# Altium PCB PCB_oshpark.PcbDoc
Units mil, origin at the board's own origin, x right, y up, seen from the top; angles counter-clockwise.
Board outline 1432.79 x 1377.95 mil, 2 copper layers (Top Layer, Bottom Layer), stack 62.8 mil thick; 28 components, 36 nets, 108 pads, 27 vias.
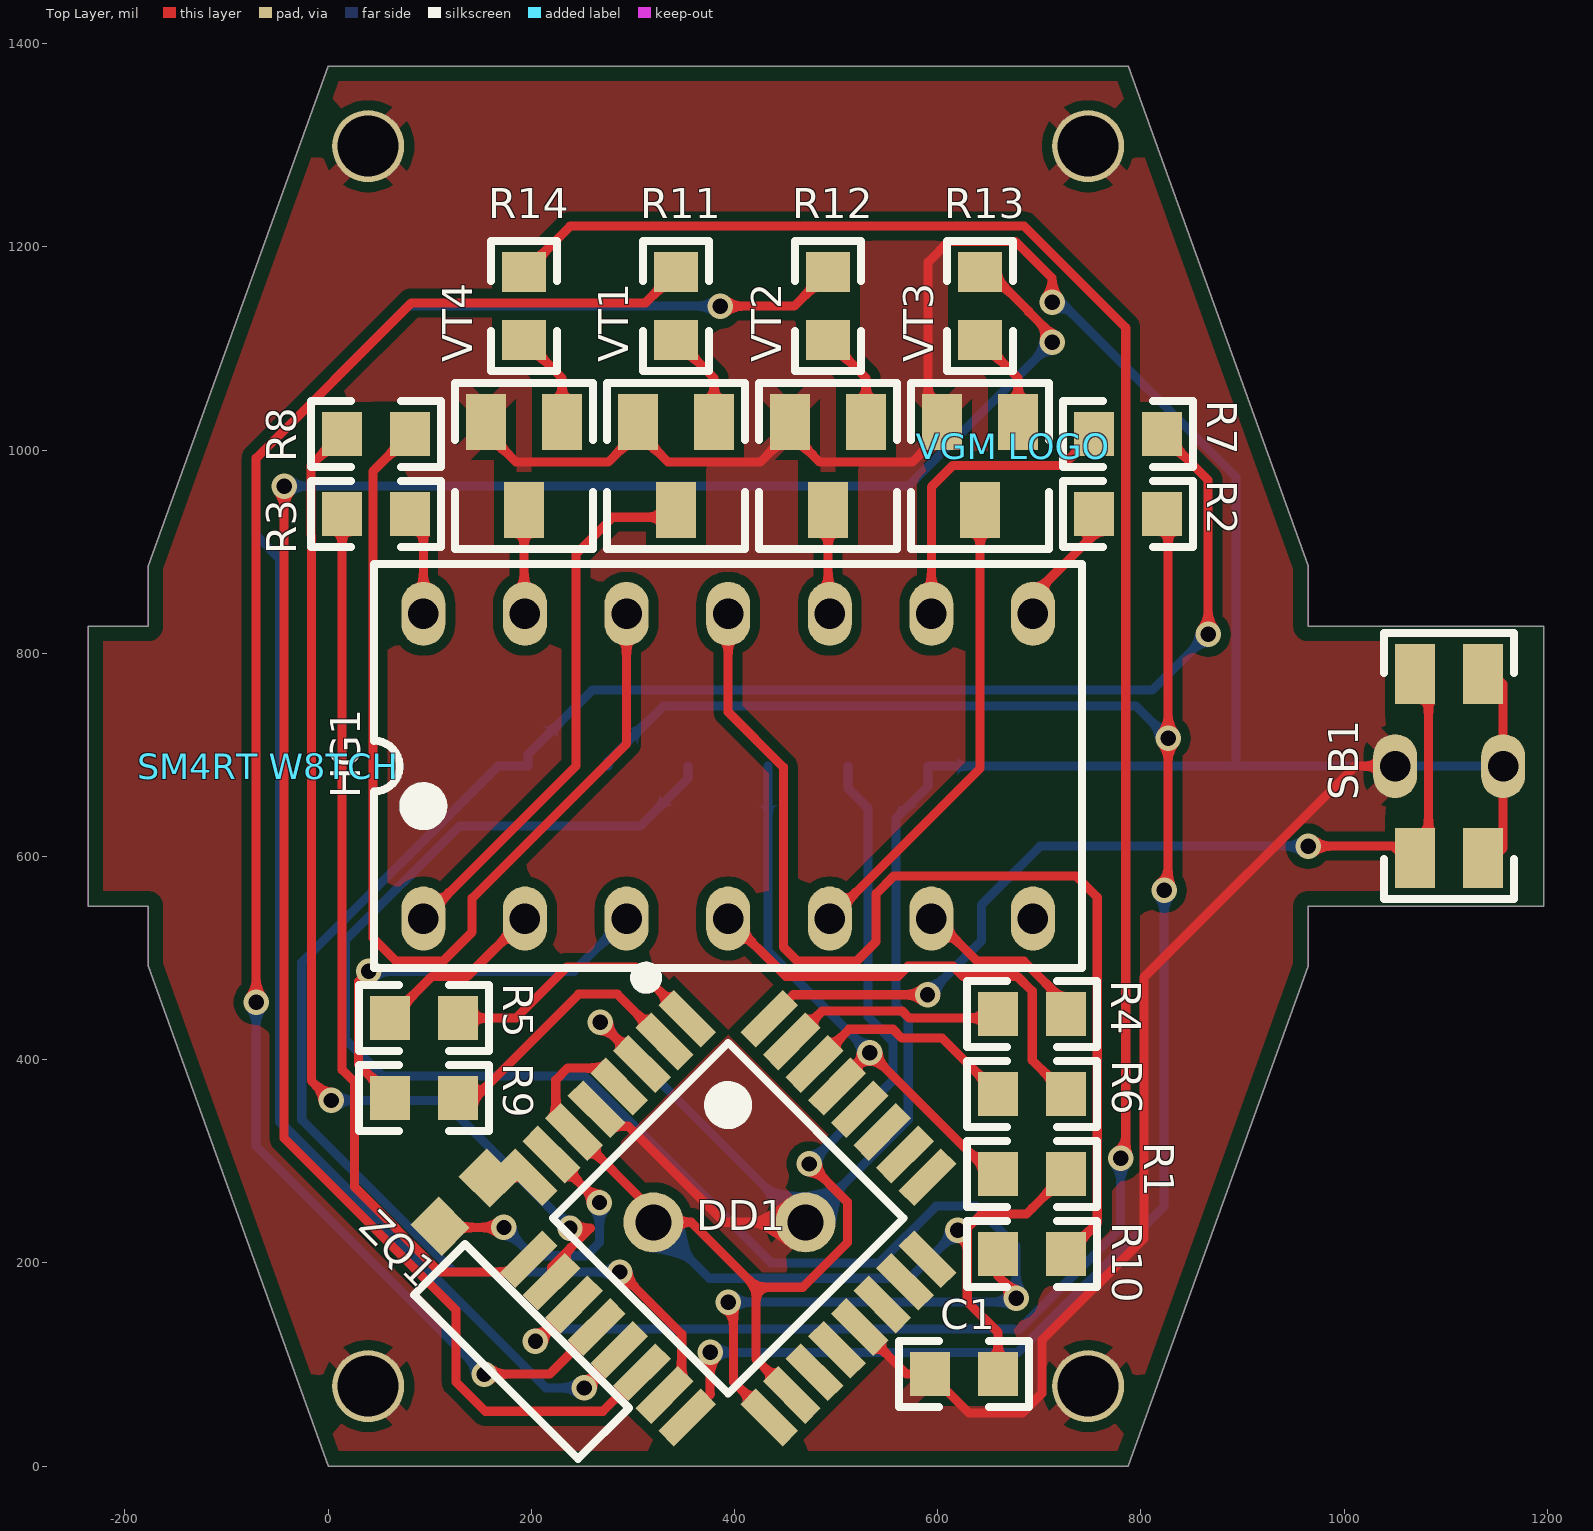
[diagram p0: Top Layer view]
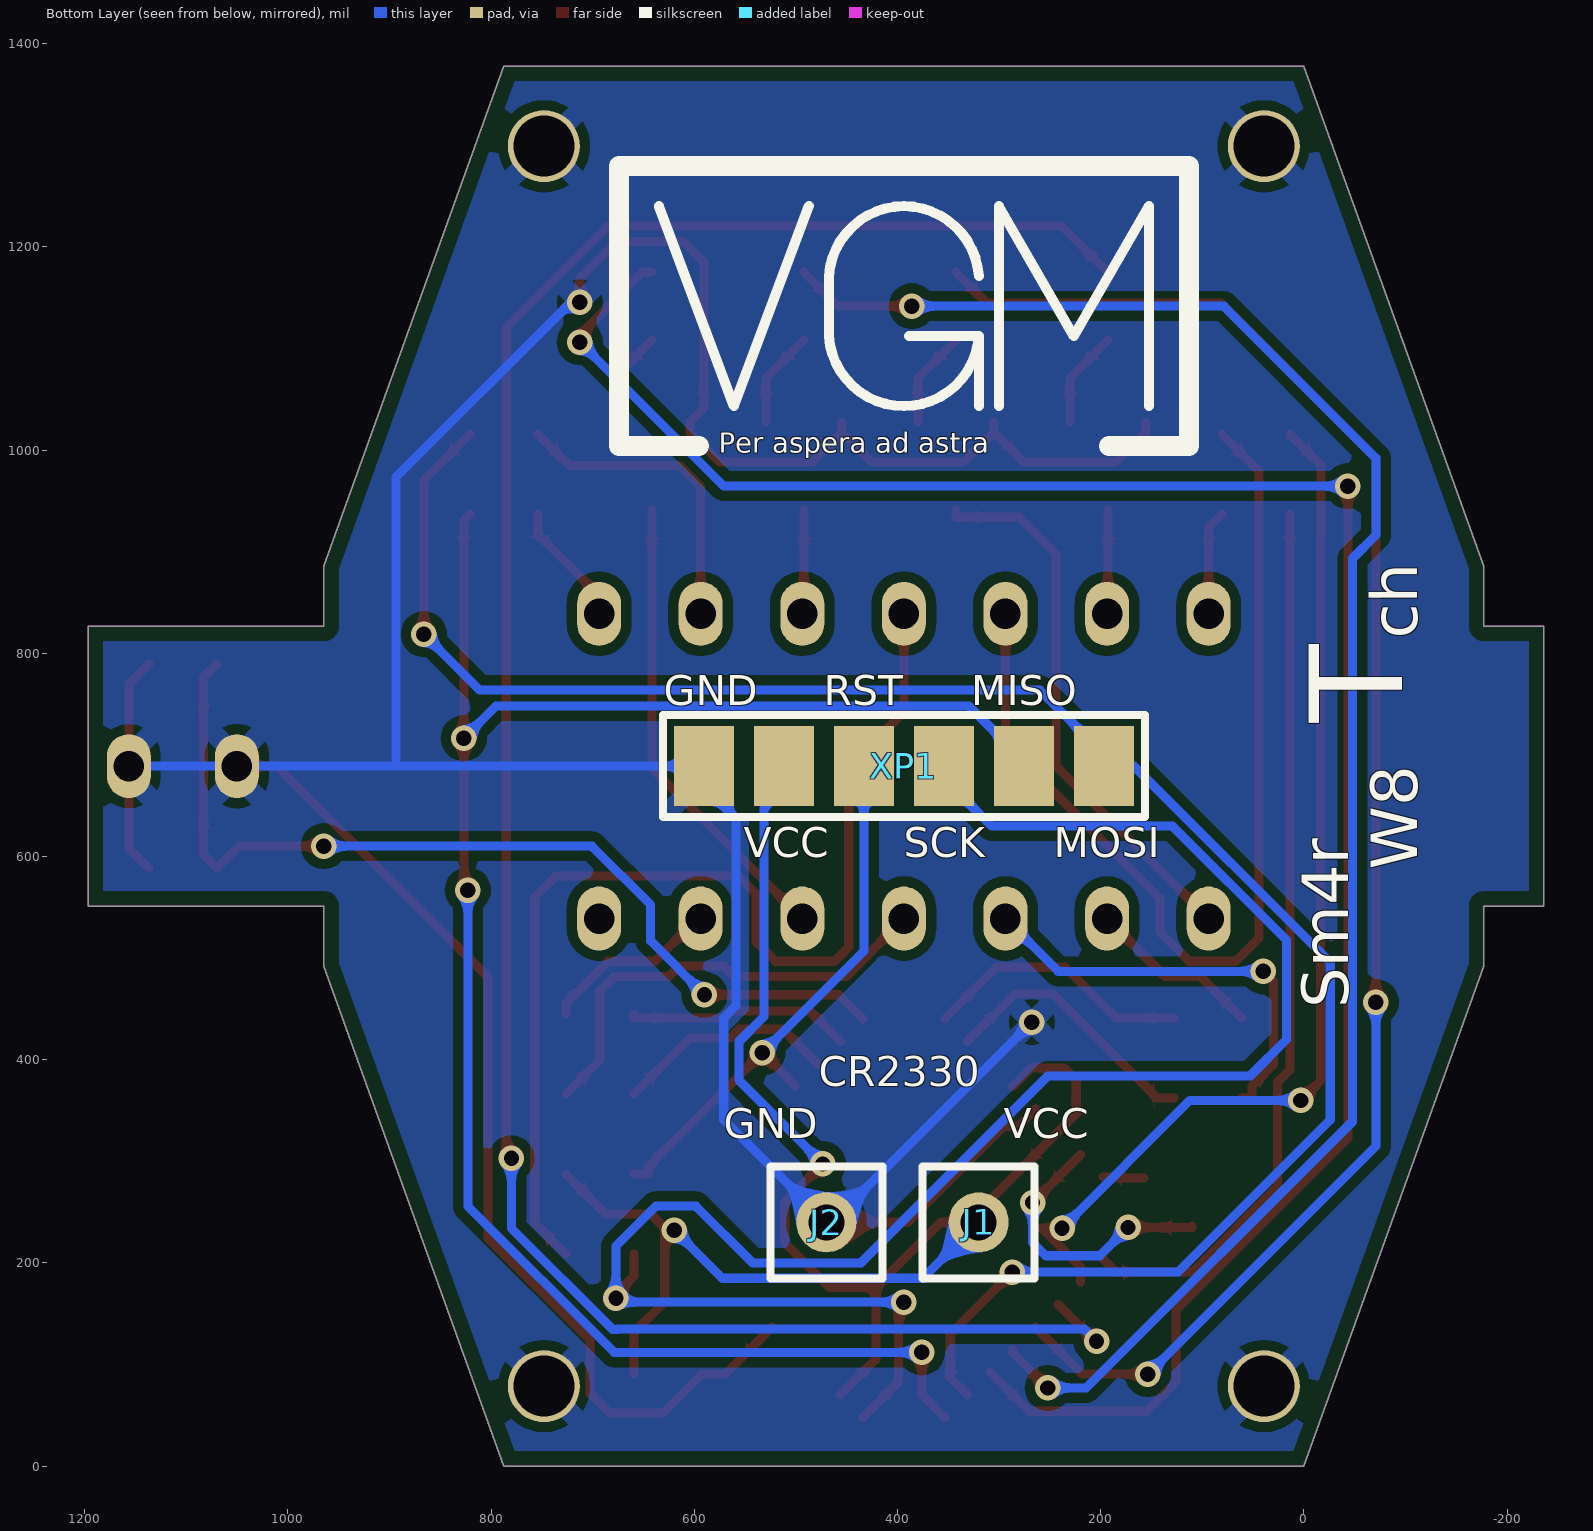
[diagram p1: Bottom Layer view, seen from below]

## Layer stack, top to bottom
Top Solder: solder mask 1, Solder Resist, Dk 3.5
Top Layer: signal copper 1.4
Dielectric 1: dielectric 60, FR-4, Dk 4.6
Bottom Layer: signal copper 1.4
Bottom Solder: solder mask 1, Solder Resist, Dk 3.5

## Board outline
-177.17,492.13 -177.17,551.18 -236.22,551.18 -236.22,826.77 -177.17,826.77 -177.17,885.83 0,1377.95 787.4,1377.95 964.57,885.83 964.57,826.77 1196.57,826.77 1196.57,551.18 964.57,551.18 964.57,492.13 787.4,0 0,0

## Design rules (kind name [scope] priority, off if disabled: settings)
Clearance Clearance_KeepOut [OnLayer('Keep-Out Layer') vs InNetClass('All Nets')] p1: gap=15
Clearance [All] p2: gap=6 except(10: Arc-Poly Track-Poly SMDPad-Poly THPad-Poly Via-Poly Fill-Poly Poly-Poly)
ComponentClearance [All] p1: gap=1 collisioncheckmode=3 verticalgap=10 showdistances=FALSE
PolygonConnect [All] p1: connectstyle=Relief reliefconductorwidth=19.68 reliefentries=4 polygonreliefangle="45 Angle" airgapwidth=9.84
RoutingVias [All] p1: holewidth=15 width=25 viastyle="Through Hole" minholewidth=15 minwidth=25 maxholewidth=30 maxwidth=40
SMDNeckDown [All] p1: percent=50.000
SilkToSilkClearance [All] p1: silktosilkclearance=1
SolderMaskExpansion [All] p1: expansion=4
Width [All] p1: maxlimit=40 minlimit=9 preferedwidth=9 minimp=50.000000 maximp=50.000000 favimp=50.000000
28 further rules are at their usual default settings.

## Classes and differential pairs
pad class "Through hole": Free- HG1-1 HG1-2 HG1-3 HG1-4 HG1-5 HG1-6 HG1-7 HG1-8 HG1-9 HG1-10 HG1-11 HG1-12 HG1-13 HG1-14 J1-1 J2-1 SB1-GND
pad class SMT: C1-1 C1-2 DD1-1 DD1-2 DD1-3 DD1-4 DD1-5 DD1-6 DD1-7 DD1-8 DD1-9 DD1-10 DD1-11 DD1-12 DD1-13 DD1-14 DD1-15 DD1-16 DD1-17 DD1-18 DD1-19 DD1-20 DD1-21 DD1-22 DD1-23 DD1-24 DD1-25 DD1-26 DD1-27 DD1-28 DD1-29 DD1-30 DD1-31 DD1-32 R1-1 R1-2 R2-1 R2-2 R3-1 R3-2 R4-1 R4-2 R5-1 R5-2 R6-1 R6-2 R7-1 R7-2 R8-1 R8-2 R9-1 R9-2 R10-1 R10-2 R11-1 R11-2 R12-1 R12-2 R13-1 R13-2 R14-1 R14-2 SB1-1 SB1-2 SB1-3 SB1-4 VT1-1 VT1-2 VT1-3 VT2-1 VT2-2 VT2-3 VT3-1 VT3-2 VT3-3 VT4-1 VT4-2 VT4-3 XP1-1 XP1-2 XP1-3 XP1-4 XP1-5 XP1-6 Y1-1 Y1-2

## Components (designator, comment, footprint, x,y, rotation, side; value= is the part's Value field where it differs from the comment)
C1 "Ceramic Cap" "MLCC 0603 (1608)" 625.98,90.55 r0 top
DD1 "ATmega48" TQFP-32 393.7,244.1 r315 top locked
HG1 "GNQ-2841Cx/Dx" GNQ-2841CX/DX 393.7,688.98 r0 top locked
J1 "Vcc" PIN1 320,240 r0 bottom locked
J2 "GND" PIN1 470,240 r0 bottom locked
R1 "Resistor" "RESISTOR 0603 (1208)" 692.91,287.4 r0 top
R2 "Resistor" "RESISTOR 0603 (1208)" 787.4,937.01 r180 top
R3 "Resistor" "RESISTOR 0603 (1208)" 47.24,937.01 r0 top
R4 "Resistor" "RESISTOR 0603 (1208)" 692.91,444.88 r0 top
R5 "Resistor" "RESISTOR 0603 (1208)" 94.49,440.95 r180 top
R6 "Resistor" "RESISTOR 0603 (1208)" 692.91,366.14 r0 top
R7 "Resistor" "RESISTOR 0603 (1208)" 787.4,1015.75 r180 top
R8 "Resistor" "RESISTOR 0603 (1208)" 47.24,1015.75 r0 top
R9 "Resistor" "RESISTOR 0603 (1208)" 94.49,362.21 r180 top
R10 "Resistor" "RESISTOR 0603 (1208)" 692.91,208.66 r0 top
R11 "Resistor" "RESISTOR 0603 (1208)" 342.52,1141.73 r270 top
R12 "Resistor" "RESISTOR 0603 (1208)" 492.13,1141.73 r270 top
R13 "Resistor" "RESISTOR 0603 (1208)" 641.73,1141.73 r270 top
R14 "Resistor" "RESISTOR 0603 (1208)" 192.91,1141.73 r270 top
SB1 "IT-1189UE" IT-1189UE 1103.35,688.98 r90 top
"SM4RT W8TCH" "" "Sm4rt W8tch" -59.06,688.92 r90 top
"VGM LOGO" "" "LOGO medium" 674.21,1003.94 r180 top
VT1 "BC817-40" SOT-23 342.52,984.25 r180 top
VT2 "BC817-40" SOT-23 492.13,984.25 r180 top
VT3 "BC817-40" SOT-23 641.73,984.25 r180 top
VT4 "BC817-40" SOT-23 192.91,984.25 r180 top
XP1 "AVR Programming Connector" "AVR PROGRAMMING SMD PAD" 393.7,688.98 r180 bottom locked
ZQ1 "XTAL" "XTAL 32.768 KHZ 0603" 133.86,259.84 r225 top

## Footprints (in the part's own frame and the unit in brackets; to place one, negate y for a bottom-side part, rotate by r counter-clockwise, add the part's x,y. Pads: shape width x height; smd on the part's side, far side on the other; paste and mask are expansions set on the pad)
"AVR PROGRAMMING SMD PAD" [mm] "Group of pads for programming AVR MCU"
  rect 1.5x2 smd mask+0.1: 1(-5,0) 2(-3,0) 3(-1,0) 4(1,0) 5(3,0) 6(5,0)
  silkscreen extent -6.02,-1.28 6.02,1.28
GNQ-2841CX/DX [mm] "7 Segment Display x4"
  oval 1.1x1.6 hole 0.762 unplated mask+0.075: 1(-7.62,-3.81) 2(-5.08,-3.81) 3(-2.54,-3.81) 4(0,-3.81) 5(2.54,-3.81) 6(5.08,-3.81) 7(7.62,-3.81) 8(7.62,3.81) 9(5.08,3.81) 10(2.54,3.81) 11(0,3.81) 12(-2.54,3.81) 13(-5.08,3.81) 14(-7.62,3.81)
  silkscreen extent -8.85,-5.05 8.85,5.05, body extent -16.1,-5.05 16.1,5.05, height 4.7
IT-1189UE [mm] "SMD Tact Switch"
  rect 1.5x1 smd mask+0.1: 1(-2.3,0.85) 2(2.3,0.85) 3(-2.3,-0.85) 4(2.3,-0.85)
  oval 1.6x1.1 hole 0.762 unplated mask+0.075: GND(0,1.35) GND(0,-1.35)
  silkscreen extent -3.32,-1.63 3.32,1.63, body extent -2.75,-2.8 2.75,1.8, height 1.6
"LOGO medium" [mil] "My logo (14.25x7)"
"MLCC 0603 (1608)" [mm] "Ceramic Cap"
  rect 1x1.1 smd mask+0.1: 1(-0.85,0) 2(0.85,0)
  silkscreen extent -1.63,-0.82 1.63,0.82, body extent -0.8,-0.4 0.8,0.4, height 0.81
PIN1 [mm] "Connector; Plug"
  round 1.5 hole 0.9 unplated mask+0.075: 1(0,0)
  silkscreen extent -1.4,-1.4 1.4,1.4
"RESISTOR 0603 (1208)" [mm] "SMD Chip Resistor"
  rect 1x1.1 smd mask+0.1: 1(-0.85,0) 2(0.85,0)
  silkscreen extent -1.63,-0.82 1.63,0.82, body extent -0.8,-0.42 0.8,0.43, height 0.46
"Sm4rt W8tch" [mil] "Sm4rt W8tch official logo"
SOT-23 [mm]
  rect 1x1.4 smd mask+0.1: 1(-0.95,-1.1) 2(0.95,-1.1) 3(0,1.1)
  silkscreen extent -1.73,-2.07 1.73,2.07, body extent -1.45,-1.2 1.45,1.2, height 1
TQFP-32 [mm] "TQFP, 32-Leads"
  rect 1.5x0.55 smd mask+0.1: 1(-4.25,2.8) 2(-4.25,2) 3(-4.25,1.2) 4(-4.25,0.4) 5(-4.25,-0.4) 6(-4.25,-1.2) 7(-4.25,-2) 8(-4.25,-2.8) 17(4.25,-2.8) 18(4.25,-2) 19(4.25,-1.2) 20(4.25,-0.4) 21(4.25,0.4) 22(4.25,1.2) 23(4.25,2) 24(4.25,2.8)
  rect 0.55x1.5 smd mask+0.1: 9(-2.8,-4.25) 10(-2,-4.25) 11(-1.2,-4.25) 12(-0.4,-4.25) 13(0.4,-4.25) 14(1.2,-4.25) 15(2,-4.25) 16(2.8,-4.25) 25(2.8,4.25) 26(2,4.25) 27(1.2,4.25) 28(0.4,4.25) 29(-0.4,4.25) 30(-1.2,4.25) 31(-2,4.25) 32(-2.8,4.25)
  silkscreen extent -5.9,-3.1 3.1,3.1, body extent -4.5,-4.5 4.5,4.5, height 1.2
"XTAL 32.768 KHZ 0603" [mm] "SMD 2x6 mm XTAL 32.768 kHz"
  rect 1x1.1 smd mask+0.1: 1(-0.85,0) 2(0.85,0)
  silkscreen extent 0.72,0.75 2.52,6.55, body extent 0.63,0.65 2.62,6.65, height 1.99

## Part data
DD1: "8-bit AVR MCU"
HG1: "Green 7-segment display x 4"
J1 J2: library part Socket, "Socket"
SB1: "SMD Tact Switch"
"SM4RT W8TCH": library part "SM4RT W8TCH", "SM4RT W8TCH Logo"
"VGM LOGO": library part "VGM LOGO", "VGM Electronics Logo"
VT1 VT2 VT3 VT4: "NPN General Purpose Transistor"
XP1: library part "AVR Programming Pad", "Group of pads for programming AVR MCU"
ZQ1: "Quartz Oscillator"

## Free pads (board coordinates)
  round 70.87 hole 60 unplated mask+2.95: ""(39.37,78.74) ""(39.37,1299.21) ""(748.03,78.74) ""(748.03,1299.21)

## Via types
v1: diameter 25, hole 15, Top Layer to Bottom Layer, 27 vias

## Nets (pads, with @x,y where several pads share a name; then routed paths per layer and width w, separated by ;. In a path a pad name is that pad's centre, name@x,y a point inside that pad or via, vN(x,y) a via of type N, cw(c..) or ccw(c..) an arc to the next point about the centre after c; other vN are vias at no path point)
A: DD1.16 R2.1 XP1.5 | length 1857.3
  Top Layer w9: DD1.16 376.37,70.87 376,70.87 v1(376,112) ; R2.1 826.77,931.1 v1(826.77,716.54) 826.77,570.87 v1(822.83,566.93)
  Bottom Layer w9: XP1.5 275.59,693.98 329.63,748.03 795.28,748.03 v1(826.77,716.54) ; v1(376,112) 678.93,112 822.83,255.91 v1(822.83,566.93)
B: DD1.9 R3.1 | length 878.7
  Top Layer w9: R3.1 13.78,390.2 26,377.98 26,274.74 109.74,191 184.71,191 DD1.9
BUTTON: DD1.32 SB1.1 SB1.2 | length 947.6
  Top Layer w9: DD1.32 457.71,464 v1(590,464) ; v1(964.57,610.24) 1048.23,610.24 1069.88,588.58 1083,601.7 1083,776.25 SB1.2@1069.88,789.37
  Bottom Layer w9: v1(590,464) 643,517 643,552.45 700.79,610.24 v1(964.57,610.24)
C: DD1.31 R4.1 | length 222.3
  Top Layer w9: DD1.31 486.25,448 565,448 572,441 659.45,441 R4.1
D: DD1.1 R5.1 | length 267.1
  Top Layer w9: R5.1 184.76,440.95 234.81,491 302.69,491 DD1.1
D5/6: DD1.17 R10.1 XP1.4 | length 1834.3
  Top Layer w9: v1(393.7,161.42) 399,156.12 399,82.9 DD1.17 ; R10.1 659.45,187 681.09,165.35 v1(677.16,165.35)
  Bottom Layer w9: XP1.4 354.33,677.16 307.09,629.92 129.33,629.92 17,517.59 17,420.01 53.01,384 252,384 436.03,199.97 542.49,199.97 598.43,255.91 637.79,255.91 677.16,216.53 v1(677.16,165.35) 681.1,161.42 v1(393.7,161.42)
DIG.1: DD1.12 R11.1 | length 1613.7
  Top Layer w9: v1(-70.87,456.69) -70.87,992.13 82.01,1145 312.32,1145 R11.1 ; v1(153.54,90.55) 217.89,90.55 DD1.12
  Bottom Layer w9: v1(-70.87,456.69) -70.87,314.96 v1(153.54,90.55)
DIG.2: DD1.13 R12.1 | length 1761.7
  Top Layer w9: v1(252,77) 286.52,111.52 DD1.13 ; v1(385.83,1141.73) 458.66,1141.73 R12.1
  Bottom Layer w9: v1(252,77) 214.34,77 -47.87,339.2 -47.87,893.34 -70.87,916.34 -70.87,992.13 78.74,1141.73 v1(385.83,1141.73)
DIG.3: DD1.14 R13.1 | length 2080.9
  Top Layer w9: v1(-43.31,964.57) -43.31,322.83 125.98,153.54 125.98,82.78 154.76,54 270.42,54 DD1.14 ; R13.1 651.18,1175.2 689.6,1136.78 689.6,1136.14 712.6,1113.14 v1(712.6,1106.3)
  Bottom Layer w9: v1(-43.31,964.57) 570.86,964.57 v1(712.6,1106.3)
DIG.4: DD1.11 R14.1 | length 2216
  Top Layer w9: R14.1 193,1175.2 238.27,1220.47 685.04,1220.47 785,1120.51 785,308 v1(780,303) ; v1(204,123) 205.79,123 DD1.11
  Bottom Layer w9: v1(204,123) 216,135 674.99,135 675.51,134.48 680.2,134.48 780,234.28 v1(780,303)
DP: DD1.2 R9.1 | length 264.8
  Top Layer w9: R9.1 144.21,362.21 246.57,464.57 284.59,464.57 DD1.2
E: DD1.30 R6.1 | length 221.4
  Top Layer w9: DD1.30 512.79,430 556,430 564.74,421.26 604.33,421.26 R6.1
F: DD1.15 R7.1 XP1.6 | length 1931.6
  Top Layer w9: v1(287,191) 348,130 348,87.04 DD1.15 ; R7.1@820.87,1015.75 866.14,970.47 v1(866.14,818.9)
  Bottom Layer w9: v1(287,191) 123.96,191 -26,340.96 -26,495.81 167.19,689 XP1.6 196.85,700.79 259.84,763.78 811.02,763.78 v1(866.14,818.9)
G: DD1.10 R8.1 | length 1054.2
  Top Layer w9: v1(3,360) -16.5,379.5 -16.5,915.71 -17,916.21 -17,984.97 13.78,1015.75 R8.1@13.78,1014 ; DD1.10 219.71,195.84 258,234.13 v1(238,234.13)
  Bottom Layer w9: v1(3,360) 112.13,360 v1(238,234.13)
GND: C1.1 DD1.3 DD1.5 DD1.21 J2.1 pad. SB1.3 SB1.4 SB1.GND VT1.2 VT2.2 VT3.2 VT4.2 XP1.1 | length 4636.5
  Top Layer w9: VT4.2 155.51,1017.72 185.04,988.19 275.59,988.19 VT1.2@305.12,1017.72 ; DD1.5 280.88,334.65 295.26,334.65 389.91,240 J2.1 ; v1(267.72,437.01) 267.72,436.89 DD1.3 ; VT1.2 VT1.2@305.12,1017.72 ; DD1.21 569.51,90.56 C1.1 630.58,52.49 683.48,52.49 702.53,71.54 702.53,124 803,224.47 803,481.2 1010.78,688.98 SB1.GND@1050.2,688.98 ; v1(712.6,1145.67) 712.6,1169.29 676.42,1205.47 610.98,1205.47 590.55,1185.04 590.55,1041.34 VT3.2 604.33,1017.72 574.8,988.19 483.89,988.19 454.72,1017.35 VT2.2 454.59,1017.59 425.2,988.19 334.65,988.19 VT1.2@305.12,1017.72 ; SB1.3@1136.81,588.58 1156.5,608.27 1156.5,769.69 SB1.4@1136.81,789.37
  Bottom Layer w9: v1(267.72,437.01) 464.72,240 J2.1 571,341 571,441 559,453 559,637.74 590.55,669.29 XP1.1@590.55,688.98 ; v1(712.6,1145.67) 721.33,1145.67 893.7,973.3 893.7,688.98 820.01,688.98 XP1.1@590.55,688.98 ; SB1.GND@1156.5,688.98 883,688.98 XP1.1@590.55,688.98
NetDD1_7: DD1.7 ZQ1.2 | length 281.3
  Top Layer w9: ZQ1.2 110.19,235 v1(173,235) ; DD1.7 v1(267,259.44)
  Bottom Layer w9: v1(173,235) 200.97,207.03 254.03,207.03 267,220 v1(267,259.44)
NetDD1_8: DD1.8 ZQ1.1 | length 40.3
  Top Layer w9: ZQ1.1 177,283.51 177.95,284.46 DD1.8
NetHG1_1: HG1.1 VT1.3 | length 541.7
  Top Layer w9: HG1.1 244.09,689.37 244.09,898.09 280,934 342.52,934 VT1.3
NetHG1_2: HG1.2 R5.2 | length 173.3
  Top Layer w9: R5.2 102.06,481.98 136.7,481.98 HG1.2
NetHG1_3: HG1.3 R9.2 | length 422.8
  Top Layer w9: v1(40,487) 30,477 30,395.2 51.18,374.02 51.18,362.21 R9.2
  Bottom Layer w9: v1(40,487) 241.72,487 HG1.3
NetHG1_4: HG1.4 R6.2 | length 452.5
  Top Layer w9: HG1.4 450.7,481.98 560.72,481.98 570.87,492.13 614.86,492.13 625,481.98 678.54,481.98 693,467.52 693,399.52 R6.2
NetHG1_5: HG1.5 VT3.3 | length 463.3
  Top Layer w9: HG1.5 641.73,687.01 VT3.3
NetHG1_6: HG1.6 R4.2 | length 189.1
  Top Layer w9: HG1.6 593.7,529 600.27,535.57 638.85,496.98 684.75,496.98 726.38,455.36 R4.2
NetHG1_8: HG1.8 R2.2 | length 123
  Top Layer w9: HG1.8 693.7,857 753.94,917.24 R2.2
NetHG1_9: HG1.9 R7.2 | length 306.5
  Top Layer w9: HG1.9 593.7,963.7 615,985 723.19,985 R7.2@753.94,1015.75
NetHG1_10: HG1.10 VT2.3 | length 102.6
  Top Layer w9: VT2.3 492.13,840.55 HG1.10
NetHG1_11: HG1.11 R10.2 | length 1100.4
  Top Layer w9: HG1.11 393.7,742.3 448,688 448,510.98 462,496.98 519.98,496.98 539.37,516.37 539.37,563.43 556.94,581 736,581 757,560 757,239.29 R10.2
NetHG1_12: HG1.12 R8.2 | length 1006.3
  Top Layer w9: R8.2@80.71,1015.75 44,979.04 44,520 67.02,496.98 112.98,496.98 141.73,525.73 141.73,559.06 293.7,711.02 HG1.12
NetHG1_13: HG1.13 VT4.3 | length 102.3
  Top Layer w9: VT4.3 192.91,839.76 HG1.13
NetHG1_14: HG1.14 R3.2 | length 103.4
  Top Layer w9: R3.2 93.7,924.02 HG1.14
NetR11_2: R11.2 VT1.1 | length 96.2
  Top Layer w9: R11.2 379.92,1070.87 VT1.1
NetR12_2: R12.2 VT2.1 | length 96.2
  Top Layer w9: R12.2 529.53,1070.87 VT2.1
NetR13_2: R13.2 VT3.1 | length 96.2
  Top Layer w9: R13.2 679.13,1070.87 VT3.1
NetR14_2: R14.2 VT4.1 | length 96.2
  Top Layer w9: R14.2 230.31,1070.87 VT4.1
RST: DD1.29 R1.1 XP1.3 | length 550.2
  Top Layer w9: DD1.29 500.88,374.88 v1(533,407) 645.67,294.33 645.67,287.4 R1.1
  Bottom Layer w9: XP1.3 433.07,506.93 v1(533,407)
VCC: C1.2 DD1.4 DD1.6 DD1.18 J1.1 R1.2 XP1.2 | length 1772.9
  Top Layer w9: DD1.4 268.07,392 236,392 224,380 224,346.98 DD1.6 320,250.98 J1.1 357.35,240 421.26,176.09 ; DD1.18 421.26,105.18 421.26,176.09 ; v1(473.5,297.5) 511,260 511,220 467.09,176.09 421.26,176.09 ; v1(619.62,232.28) 629,232.28 629,162 659.45,131.55 C1.2 ; v1@629.26,234.67 642.63,248.03 687.21,248.03 693,253.82 693,254.03 R1.2
  Bottom Layer w9: J1.1 375.03,184.97 572.31,184.97 v1(619.62,232.28) ; v1(473.5,297.5) 556,380 556,418 531.5,442.5 531.5,647.31 511.81,667 XP1.2
pads on no net: DD1.19 DD1.20 DD1.22 DD1.23 DD1.24 DD1.25 DD1.26 DD1.27 DD1.28 HG1.7

## Polygon pours and split planes (outlines as drawn)
GND on Top Layer "GND" (solid, remove dead copper, pour order 9): 1232.28,-15.75 -342.52,-15.75 -350.39,-23.62 -291.34,35.43 -291.34,1480.31 1236.22,1480.31 1259.84,1456.69
GND on Bottom Layer "GND2" (solid, remove dead copper, pour order 11): 1255.91,1417.32 1232.28,1393.7 1232.28,0 1204.72,-27.56 -460.63,-27.56 -460.63,1137.8 -200.79,1397.64

## Keep-outs
Keep-Out Layer:
  the board outline again, w0.01

## Silkscreen, mask and mechanical layers (free items; w line width, h text height)
Bottom Overlay:
  text "CR2330" at 477.33,374.02 h29.53
  text "VCC" at 295.28,322.83 h29.53
  text "GND" at 570.87,322.83 h29.53
Mechanical 1:
  the board outline again, w0.01
Mechanical 2:
  lines w3.94: -177.17,895.67 -248.03,895.67 -248.03,482.28 -177.17,482.28 35.43,482.28 153.54,482.28 633.86,482.28 751.97,482.28 ; -177.17,895.67 -177.17,895.67 ; -177.17,895.67 -11.81,895.67 ; -11.81,895.67 -11.81,895.67 ; -11.81,895.67 846.46,895.67 964.57,895.67 1035.43,895.67 1035.43,828.74 1035.43,807.09 1035.43,570.87 1035.43,549.21 1035.43,482.28 964.57,482.28 ; -11.81,895.67 -11.81,895.67 ; 751.97,482.28 964.57,482.28 ; 751.97,482.28 751.97,482.28 ; 964.57,482.28 964.57,482.28 ; -248.03,688.98 -248.03,688.97

## Text inside footprints (layer, text, board x,y; h text height)
"SM4RT W8TCH": Bottom Overlay "ch" at -126.85,814.47 h78.74 r270; Bottom Overlay "W8" at -126.85,587.16 h78.74 r270; Bottom Overlay "Sm4r" at -59.04,450.49 h78.74 r270; Bottom Overlay "T" at -126.85,731.79 h157.48 r270
"VGM LOGO": Bottom Overlay "Per aspera ad astra" at 575.73,997.38 h19.68
XP1: Bottom Overlay "MOSI" at 246.05,599.41 h29.53; Bottom Overlay "MISO" at 327.25,749.02 h29.53; Bottom Overlay "SCK" at 393.69,599.41 h29.53; Bottom Overlay "RST" at 472.43,749.02 h29.53; Bottom Overlay "VCC" at 551.17,599.41 h29.53; Bottom Overlay "GND" at 629.91,749.02 h29.53